# EAGLE board SAM32 (EAGLE 5.12)
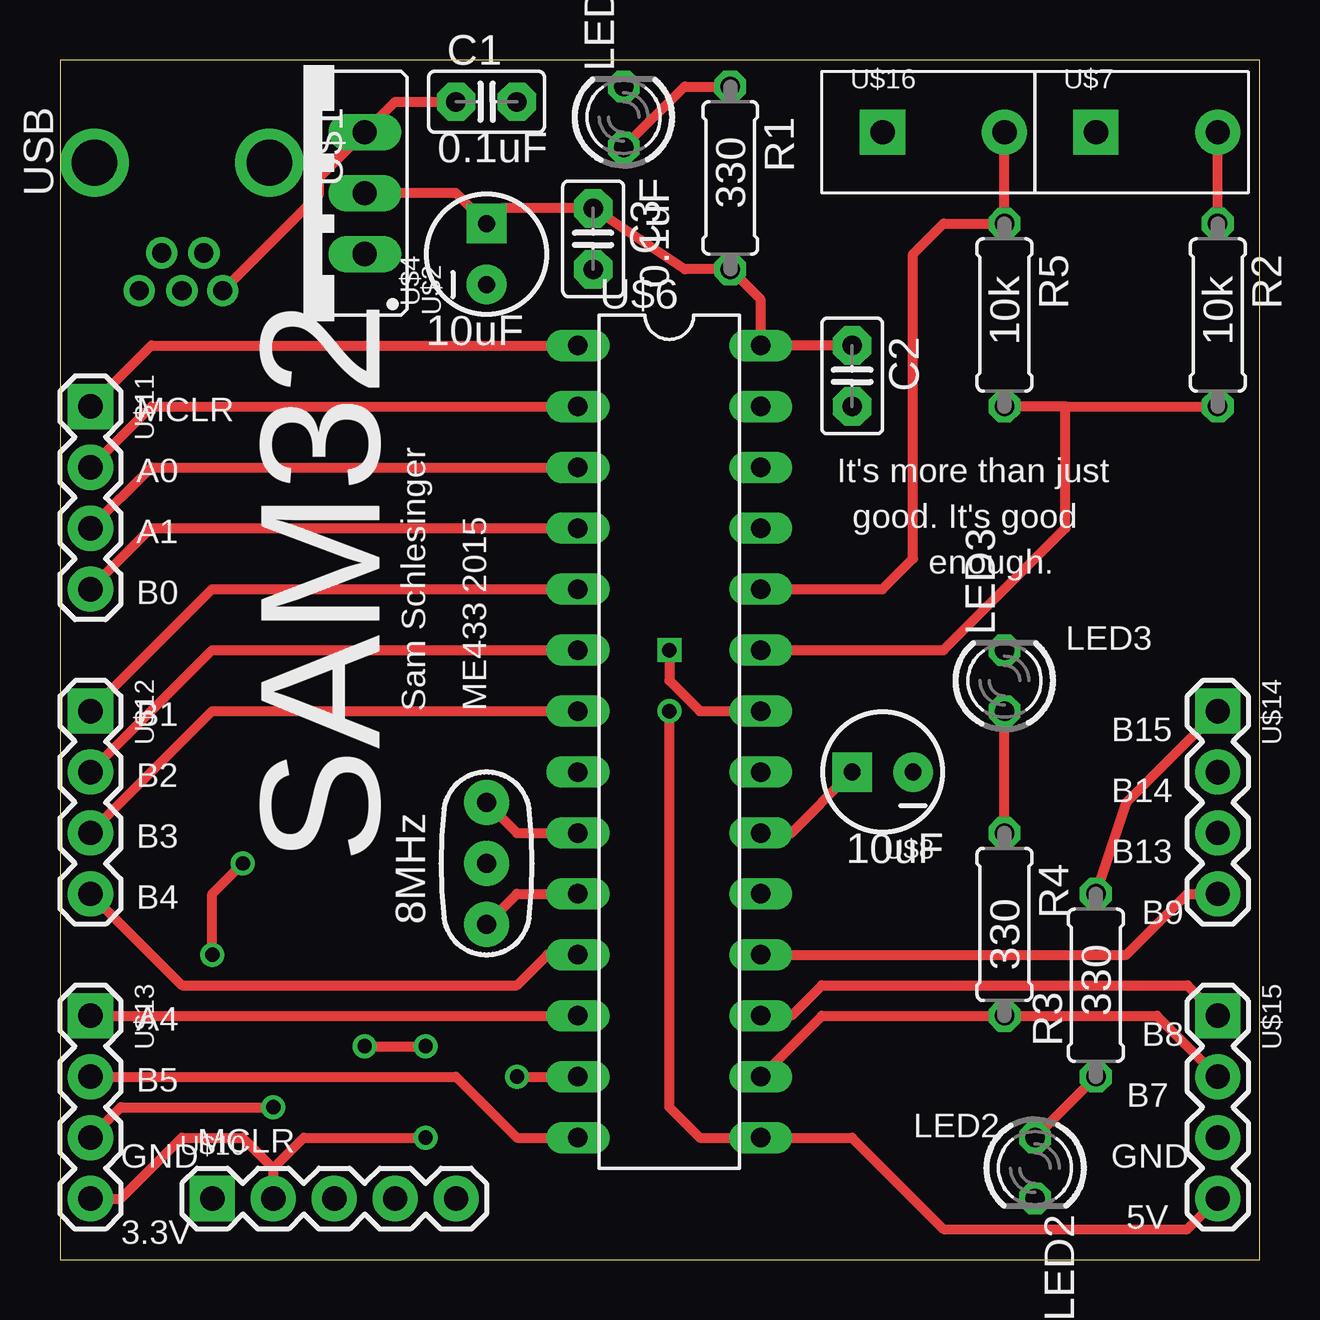
[diagram p0: board, top side]
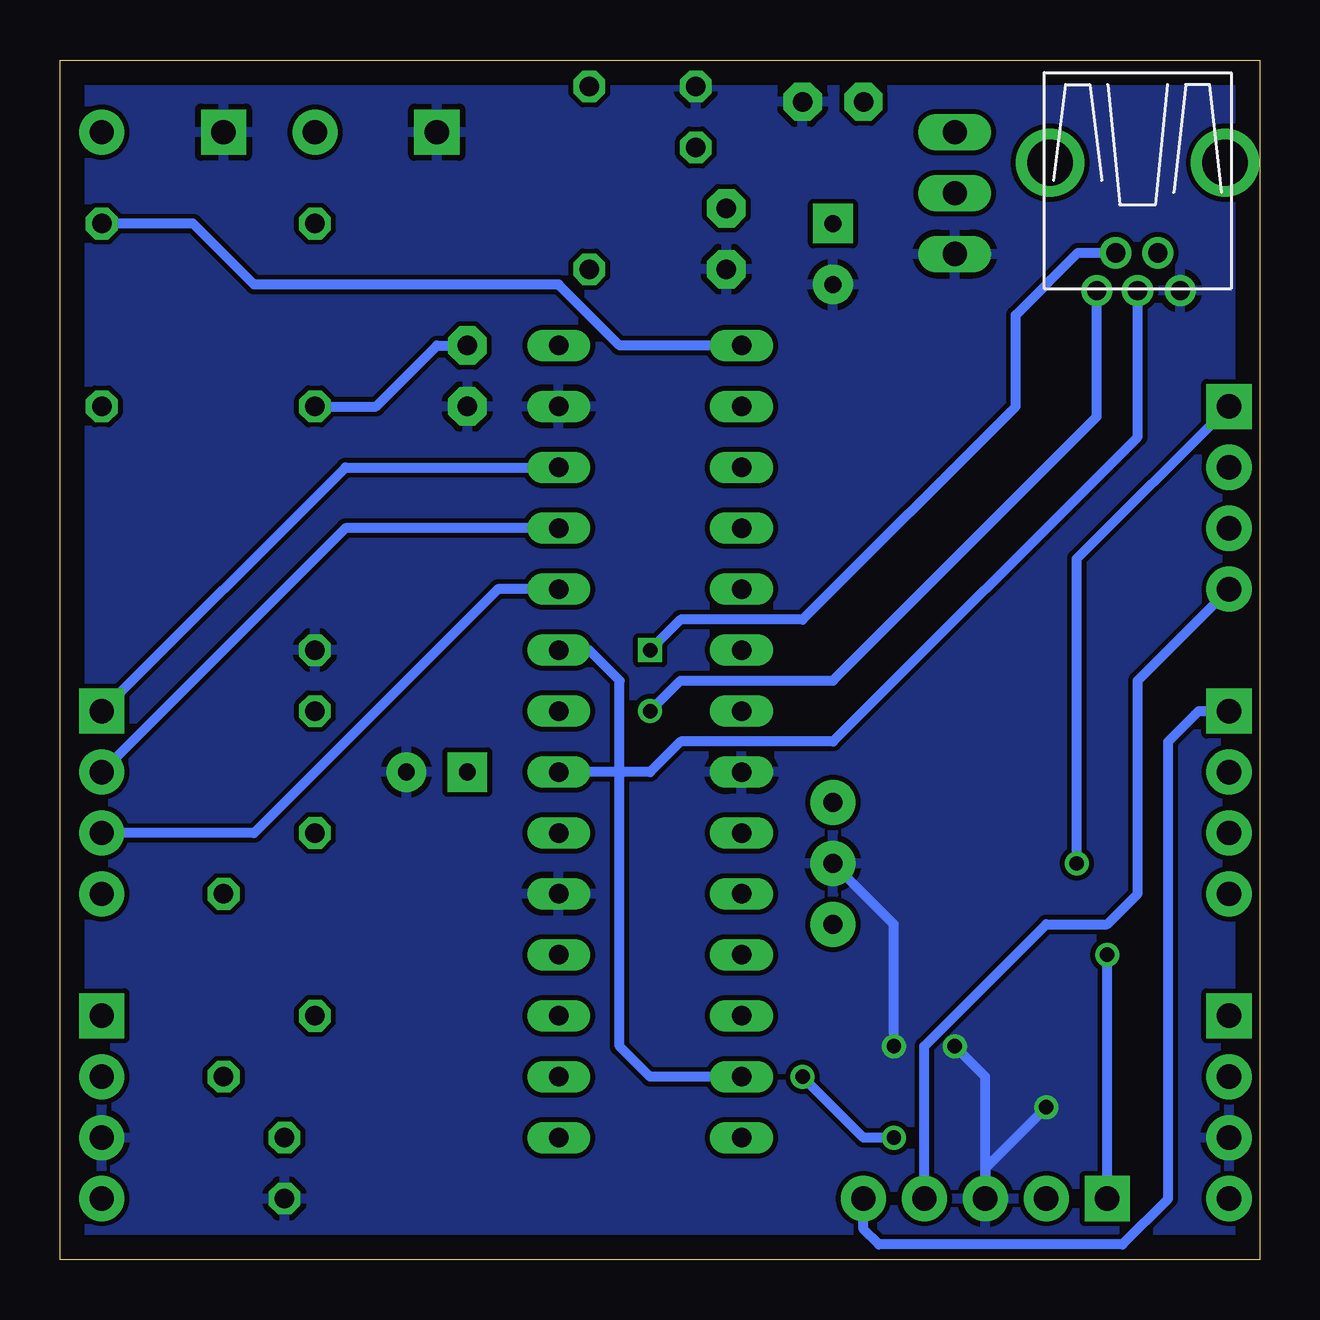
[diagram p1: board, bottom side, seen from below]

Size 50 x 50 mm. Coordinates in mm from the lower left corner, seen from the top.
Outline: 0,0 50,0 50,50 0,50 0,0
Copper layers (1*16): Top 0.035mm / dielectric 1.5mm / Bottom 0.035mm
Design rules "default": minimum track width 10mil, minimum drill 24mil, track to track 8mil, track to pad 8mil, pad to pad 8mil, via to via 8mil, smd to smd 8mil, copper to edge 40mil, drill to drill 8mil, minimum pad ring 10mil, minimum via ring 8mil, stop-mask expansion 4mil, vias tented up to drill 0mil, thermal gap 10mil

## Footprints (pad centres in the part's own frame; a part is rotated, then mirrored left to right if it is on the bottom)
C2.5-2 = drill 0.813 pad 1.6 octagon: 1 -1.27,0; 2 1.27,0
LED3MM = drill 0.813 octagon: A -1.27,0; K 1.27,0
0207/7 = drill 0.813 octagon: 1 -3.81,0; 2 3.81,0
USB-MINIB = drill 0.8 round: D+ 4.064,0; D- 2.489,0.914; GND 4.064,-1.778; ID 2.489,-0.838; VBUS 4.064,1.702 | drill 1.9 round: P$6 -1.27,-3.65; P$7 -1.27,3.65
TO220 = drill 1.016 long: 1 -2.54,0; 2 0,0; 3 2.54,0
CAP_POL_D = drill 0.7 pad 1.651 square: 1 1.27,0 | drill 0.7 pad 1.651 round: 2 -1.27,0
DIL28-3 = drill 0.813 long: 1 -16.51,-3.81; 2 -13.97,-3.81; 3 -11.43,-3.81; 4 -8.89,-3.81; 5 -6.35,-3.81; 6 -3.81,-3.81; 7 -1.27,-3.81; 8 1.27,-3.81; 9 3.81,-3.81; 10 6.35,-3.81; 11 8.89,-3.81; 12 11.43,-3.81; 13 13.97,-3.81; 14 16.51,-3.81; 15 16.51,3.81; 16 13.97,3.81; 17 11.43,3.81; 18 8.89,3.81; 19 6.35,3.81; 20 3.81,3.81; 21 1.27,3.81; 22 -1.27,3.81; 23 -3.81,3.81; 24 -6.35,3.81; 25 -8.89,3.81; 26 -11.43,3.81; 27 -13.97,3.81; 28 -16.51,3.81
1X03 = drill 1.016 pad 1.88 square: 1 0,0 | drill 1.016 pad 1.88 round: 3 5.08,0
1X05 = drill 1.016 pad 1.88 square: 1 0,0 | drill 1.016 pad 1.88 round: 2 2.54,0; 3 5.08,0; 4 7.62,0; 5 10.16,0
1X04 = drill 1.016 pad 1.88 square: 1 0,0 | drill 1.016 pad 1.88 round: 2 2.54,0; 3 5.08,0; 4 7.62,0
RESONATOR-PTH = drill 0.8 pad 1.88 round: 1 -2.54,0; 2 0,0; 3 2.54,0

## Placement (x,y rotation side)
C1  .1 uF  [C2.5-2]  17.78,48.26 0 top
C2  .1 uF  [C2.5-2]  33.02,36.83 270 top
C3  .1 uF  [C2.5-2]  22.23,42.55 270 top
LED1  [LED3MM]  23.5,47.62 90 top
LED2  [LED3MM]  40.64,3.81 270 top
LED3  [LED3MM]  39.37,24.13 90 top
R1  330  [0207/7]  27.94,45.09 270 top
R2  10k  [0207/7]  48.26,39.37 270 top
R3  330  [0207/7]  43.18,11.43 90 top
R4  330  [0207/7]  39.37,13.97 270 top
R5  10k  [0207/7]  39.37,39.37 270 top
U$1  USB  [USB-MINIB]  5.08,44.45 270 top
U$2  LD1117  [TO220]  12.7,44.45 90 top
U$4  10 uF  [CAP_POL_D]  17.78,41.91 90 top
U$6  PIC32MX250F128B  [DIL28-3]  25.4,21.59 270 top
U$7  PUSHBUTTON  [1X03]  43.18,46.99 0 top
U$8  10 uF  [CAP_POL_D]  34.29,20.32 180 top
U$10  Pickit3  [1X05]  6.35,2.54 0 top
U$11  1X04_HEADER  [1X04]  1.27,35.56 270 top
U$12  1X04_HEADER  [1X04]  1.27,22.86 270 top
U$13  1X04_HEADER  [1X04]  1.27,10.16 270 top
U$14  1X04_HEADER  [1X04]  48.26,22.86 270 top
U$15  1X04_HEADER  [1X04]  48.26,10.16 270 top
U$16  PUSHBUTTON  [1X03]  34.29,46.99 0 top
Y1  RESONATORPTH  [RESONATOR-PTH]  17.78,16.51 270 top

## Library data of the parts
C1-C3 = capacitor-wima
LED1-LED3 = led
R1-R5 = resistor
U$1 U$2 U$4 U$8 U$10-U$15 = ME433
U$6 U$7 U$16 = SLAM
Y1 = GibbotV5 (1)

## Nets
3.3V: C2.1 C3.1 R1.2 R2.2 R5.2 U$2.2 U$4.1 U$6.13 U$6.23 U$6.28 U$10.2 U$13.4
5V: C1.1 U$1.VBUS U$2.3 U$6.15 U$15.4
A0: U$6.2 U$11.2
A1: U$6.3 U$11.3
A4: U$6.12 U$13.1
B0: U$6.4 U$10.4 U$11.4
B1: U$6.5 U$10.5 U$12.1
B2: U$6.6 U$12.2
B3: U$6.7 U$12.3
B4: U$6.11 U$12.4
B5: U$6.14 U$13.2
B7: R4.2 U$6.16 U$15.2
B8: U$6.17 U$15.1
B9: U$6.18 U$14.4
B13: R5.1 U$6.24 U$14.3 U$16.3
B14: U$6.25 U$14.2
B15: R3.2 U$6.26 U$14.1
D+: U$1.D+ U$6.21
D-: U$1.D- U$6.22
GND: C1.2 C2.2 C3.2 LED1.K LED2.K LED3.K U$1.GND U$2.1 U$4.2 U$6.8 U$6.19 U$6.27 U$7.1 U$8.2 U$10.3 U$13.3 U$15.3 U$16.1 Y1.2
MCLR: R2.1 U$6.1 U$7.3 U$10.1 U$11.1
N$1: LED2.A R3.1
N$2: LED3.A R4.1
N$4: LED1.A R1.1
N$9: U$6.9 Y1.1
N$10: U$6.10 Y1.3
N$20: U$6.20 U$8.1

## Tracks (layer width: path | path; a pad name or v marks a point on that pad's centre or on a via)
3.3V  (via drill 0.6)
  Top 0.406: 41.91,35.56 R5.2 | 41.91,35.56 R2.2 | C2.1 U$6.28 29.21,40.01 R1.2 26.04,41.27 C3.1 18.41,43.81 U$4.1 16.51,44.45 U$2.2 | U$6.23 36.83,25.4 41.91,30.48 41.91,35.56 | 8.89,3.81 7.62,5.08 5.08,5.08 2.54,2.54 U$13.4 | 8.89,3.81 U$10.2 | 8.89,3.81 10.16,5.08 v15.24,5.08 | v19.05,7.62 U$6.13
  Bottom 0.406: R5.2 36.83,35.56 34.29,38.1 C2.1 | v15.24,5.08 16.51,5.08 v19.05,7.62 | U$6.13 25.4,7.62 26.67,8.89 26.67,24.13 27.94,25.4 U$6.23
5V  (via drill 0.6)
  Top 0.406: U$15.4 46.99,1.27 36.83,1.27 33.02,5.08 U$6.15 26.67,5.08 25.4,6.35 v25.4,22.86 | C1.1 13.97,48.26 U$2.3 10.79,45.09 10.79,44.4 U$1.VBUS
  Bottom 0.406: U$1.VBUS 6.78,35.13 17.78,24.13 24.13,24.13 v25.4,22.86
A0
  Top 0.406: U$11.2 3.81,35.56 U$6.2
A1
  Top 0.406: U$11.3 3.81,33.02 U$6.3
A4
  Top 0.406: U$13.1 U$6.12
B0
  Top 0.406: U$11.4 3.81,30.48 U$6.4
  Bottom 0.406: U$10.4 13.97,8.89 8.89,13.97 6.35,13.97 5.08,15.24 5.08,24.13 U$11.4
B1
  Top 0.406: U$12.1 6.35,27.94 U$6.5
  Bottom 0.406: U$12.1 2.54,22.86 3.81,21.59 3.81,2.54 5.71,0.64 15.88,0.64 16.51,1.27 U$10.5
B2
  Top 0.406: U$12.2 6.35,25.4 U$6.6
B3
  Top 0.406: U$12.3 6.35,22.86 U$6.7
B4
  Top 0.406: U$12.4 5.08,11.43 19.05,11.43 20.32,12.7 U$6.11
B5
  Top 0.406: U$13.2 16.51,7.62 19.05,5.08 U$6.14
B7
  Top 0.406: U$15.2 45.72,10.16 R4.2 31.75,10.16 U$6.16
B8
  Top 0.406: U$15.1 46.99,11.43 31.75,11.43 30.48,10.16 U$6.17
B9
  Top 0.406: U$6.18 44.45,12.7 46.99,15.24 U$14.4
B13
  Top 0.406: U$16.3 R5.1 36.83,43.18 35.56,41.91 35.56,29.21 34.29,27.94 U$6.24
  Bottom 0.406: U$6.24 31.75,27.94 41.91,17.78 U$14.3
B14
  Bottom 0.406: U$14.2 38.1,30.48 U$6.25
B15
  Top 0.406: U$14.1 44.45,19.05 R3.2
  Bottom 0.406: U$6.26 38.1,33.02 U$14.1
D+
  Bottom 0.406: U$1.D+ 5.08,34.29 17.78,21.59 24.13,21.59 25.4,20.32 U$6.21
D-  (via drill 0.6)
  Top 0.406: v25.4,25.4 25.4,24.13 26.67,22.86 U$6.22
  Bottom 0.406: U$1.D- 7.57,41.96 10.16,39.37 10.16,35.56 19.05,26.67 24.13,26.67 v25.4,25.4
GND  (via drill 0.6)
  Top 0.406: U$13.3 2.54,6.35 v8.89,6.35 | v12.7,8.89 v15.24,8.89
  Bottom 0.406: v8.89,6.35 11.43,3.81 U$10.3 11.43,7.62 v12.7,8.89 | v15.24,8.89 15.24,13.97 Y1.2
  pour Bottom: -1.27,50.8 50.8,50.8 50.8,-2.54 -1.27,-2.54
MCLR  (via drill 0.6)
  Top 0.406: U$11.1 3.81,38.1 U$6.1 | R2.1 U$7.3 | v6.35,12.7 6.35,15.24 v7.62,16.51
  Bottom 0.406: R2.1 44.45,43.18 41.91,40.64 29.21,40.64 26.67,38.1 U$6.1 | U$10.1 v6.35,12.7 | v7.62,16.51 7.62,29.21 U$11.1
N$1
  Top 0.406: LED2.A R3.1
N$2
  Top 0.406: R4.1 LED3.A
N$4
  Top 0.406: LED1.A 26.04,48.9 R1.1
N$9
  Top 0.406: Y1.1 19.05,17.78 U$6.9
N$10
  Top 0.406: Y1.3 19.05,15.24 U$6.10
N$20
  Top 0.406: U$6.20 30.48,17.78 U$8.1

## Text on the board
tPlace: 0.1uF | 0.1uF | 330 | 10uF | 10k | 10k | MCLR | A0 | It's more than just | A1 | good. It's good | enough. | B0 | LED3 | Sam Schlesinger | ME433 2015 | B1 | B15 | B2 | B14 | 10uF | B3 | SAM32 | B13 | B4 | 8MHz | B9 | 330 | A4 | 330 | B8 | B5 | B7 | LED2 | GND | MCLR | GND | 3.3V | 5V